# EAGLE board CheetahBooster (EAGLE 7.6.0)

Size 76.74 x 69.29 mm. Coordinates in mm from the lower left corner, seen from the top.
Outline: 0,0 76.74,0 76.74,69.29 0,69.29 0,0
Copper layers (1*16): Top 0.035mm / dielectric 1.5mm / Bottom 0.035mm
Design rules "default": minimum track width 10mil, minimum drill 24mil, track to track 8mil, track to pad 8mil, pad to pad 8mil, via to via 8mil, smd to smd 8mil, copper to edge 40mil, drill to drill 8mil, minimum pad ring 10mil, minimum via ring 8mil, stop-mask expansion 4mil, vias tented up to drill 0mil, thermal gap 10mil

## Footprints (pad centres in the part's own frame; a part is rotated, then mirrored left to right if it is on the bottom)
DIL16 = drill 0.813 long: 1 -8.89,-3.81; 2 -6.35,-3.81; 3 -3.81,-3.81; 4 -1.27,-3.81; 5 1.27,-3.81; 6 3.81,-3.81; 7 6.35,-3.81; 8 8.89,-3.81; 9 8.89,3.81; 10 6.35,3.81; 11 3.81,3.81; 12 1.27,3.81; 13 -1.27,3.81; 14 -3.81,3.81; 15 -6.35,3.81; 16 -8.89,3.81
DO35Z10 = drill 0.813 long: A 5.08,0; C -5.08,0
1X04 = drill 1.016 long: 1 -3.81,0; 2 -1.27,0; 3 1.27,0; 4 3.81,0
1X08 = drill 1.016 long: 1 -8.89,0; 2 -6.35,0; 3 -3.81,0; 4 -1.27,0; 5 1.27,0; 6 3.81,0; 7 6.35,0; 8 8.89,0
1206 = smd 1.6 x 1.803: A -1.422,0; C 1.422,0
R1206 = smd 1.6 x 1.803: 1 -1.422,0; 2 1.422,0
SIP10 = drill 0.6 long: 1 -11.46,0; 2 -8.92,0; 3 -6.38,0; 4 -3.84,0; 5 -1.3,0; 6 1.24,0; 7 3.78,0; 8 6.32,0; 9 8.86,0; 10 11.4,0
SOLDERJUMPER_ARROW_NOPASTE = smd 0.762 x 1.524: 1 -1.016,0; 2 1.016,0

## Placement (x,y rotation side)
4017BE  CD4017  [DIL16]  7.85,46.07 90 top
D1  1N821  [DO35Z10]  23,31.52 180 top
D2  1N821  [DO35Z10]  23,27.01 180 top
D3  1N821  [DO35Z10]  23,39.38 180 top
D4  1N821  [DO35Z10]  23,51.42 180 top
D5  1N821  [DO35Z10]  23,55.92 180 top
D6  1N821  [DO35Z10]  23,35.53 180 top
D7  1N821  [DO35Z10]  23,43.33 180 top
D8  1N821  [DO35Z10]  23,47.41 180 top
D9  1N821  [DO35Z10]  23,60.3 180 top
JP_CLOCK_IN  [1X04]  38,28.51 0 top
JP_LED  [1X08]  58.5,46.01 90 top
JP_RES_GND  [1X08]  66.2,46.01 90 top
LED_START  [1206]  6.5,29.01 0 top
R2_100_O  [R1206]  6.5,26.01 180 top
RN1  [SIP10]  69.73,18.87 90 top
SJ1  [SOLDERJUMPER_ARROW_NOPASTE]  57,11.51 0 top
SJ2  [SOLDERJUMPER_ARROW_NOPASTE]  57,8.51 0 top
SJ3  [SOLDERJUMPER_ARROW_NOPASTE]  57,5.51 0 top
SJ4  [SOLDERJUMPER_ARROW_NOPASTE]  57,18.51 0 top
SJ5  [SOLDERJUMPER_ARROW_NOPASTE]  57,15.51 0 top
SJ6  [SOLDERJUMPER_ARROW_NOPASTE]  57,22.51 0 top
SJ7  [SOLDERJUMPER_ARROW_NOPASTE]  57,25.51 0 top
SJ8  [SOLDERJUMPER_ARROW_NOPASTE]  51.5,38.51 0 top
SJ9  [SOLDERJUMPER_ARROW_NOPASTE]  51.5,41.51 0 top
SJ10  [SOLDERJUMPER_ARROW_NOPASTE]  51.5,45.51 0 top
SJ11  [SOLDERJUMPER_ARROW_NOPASTE]  51.5,48.51 0 top
SJ12  [SOLDERJUMPER_ARROW_NOPASTE]  45.5,48.51 0 top
SJ13  [SOLDERJUMPER_ARROW_NOPASTE]  45.5,45.51 0 top
SJ14  [SOLDERJUMPER_ARROW_NOPASTE]  45.5,58.51 0 top
SJ15  [SOLDERJUMPER_ARROW_NOPASTE]  45.5,55.51 0 top
SJ16  [SOLDERJUMPER_ARROW_NOPASTE]  45.5,52.51 0 top
SJ17  [SOLDERJUMPER_ARROW_NOPASTE]  63.5,25.51 0 top
SJ18  [SOLDERJUMPER_ARROW_NOPASTE]  63.5,22.51 0 top
SJ19  [SOLDERJUMPER_ARROW_NOPASTE]  63.5,19.51 0 top
SJ20  [SOLDERJUMPER_ARROW_NOPASTE]  63.5,16.51 0 top

## Library data of the parts
4017BE = SparkFun-DigitalIC; PROD_ID: IC-11929
D1-D9 = diode
JP_CLOCK_IN JP_LED JP_RES_GND = pinhead
LED_START R2_100_O = adafruit
RN1 = resistor-sip
SJ1-SJ20 = microbuilder; BOM: EXCLUDE

## Nets
DO_NOT_USE: RN1.10
GND: 4017BE.8 4017BE.13 JP_CLOCK_IN.1 R2_100_O.1 RN1.1
LED_0: JP_LED.1 SJ1.2 SJ2.2 SJ3.2
LED_1: JP_LED.2 SJ4.2 SJ5.2
LED_2: JP_LED.3 SJ6.2 SJ7.2
LED_3: JP_LED.4 SJ8.2 SJ9.2
LED_4: JP_LED.5 SJ10.2 SJ11.2
LED_5: JP_LED.6 SJ12.2 SJ13.2
LED_6: JP_LED.7 SJ14.2 SJ15.2 SJ16.2
LED_7: JP_LED.8 SJ17.2 SJ18.2 SJ19.2 SJ20.2
N$1: LED_START.C R2_100_O.2
R0: JP_RES_GND.1 RN1.2
R1: JP_RES_GND.2 RN1.3
R2: JP_RES_GND.3 RN1.4
R3: JP_RES_GND.4 RN1.5
R4: JP_RES_GND.5 RN1.6
R5: JP_RES_GND.6 RN1.7
R6: JP_RES_GND.7 RN1.8
R7: JP_RES_GND.8 RN1.9
RESET: 4017BE.11 4017BE.15
SEG_0: 4017BE.3 D1.A
SEG_0_0: D1.C LED_START.A SJ1.1
SEG_1: 4017BE.2 D2.A
SEG_1_1: D2.C SJ2.1 SJ4.1
SEG_2: 4017BE.4 D3.A
SEG_2_2: D3.C SJ3.1 SJ6.1 SJ10.1
SEG_3: 4017BE.7 D4.A
SEG_3_3: D4.C SJ5.1 SJ8.1 SJ12.1
SEG_4: 4017BE.10 D5.A
SEG_4_4: D5.C SJ7.1 SJ11.1 SJ14.1
SEG_5: 4017BE.1 D6.A
SEG_5_5: D6.C SJ9.1 SJ13.1 SJ17.1
SEG_6: 4017BE.5 D7.A
SEG_6_6: D7.C SJ15.1 SJ18.1
SEG_7: 4017BE.6 D8.A
SEG_7_7: D8.C SJ16.1 SJ19.1
SEG_8: 4017BE.9 D9.A
SEG_8_8: D9.C SJ20.1
TMR555_OUTPUT: 4017BE.14 JP_CLOCK_IN.3
TMR555_OUTPUT_REVERSE: JP_CLOCK_IN.4
VCC: 4017BE.16 JP_CLOCK_IN.2

## Tracks (layer width: path | path; a pad name or v marks a point on that pad's centre or on a via)
GND  (4 unrouted)
LED_0  (3 unrouted)
LED_1  (2 unrouted)
LED_2  (2 unrouted)
LED_3  (2 unrouted)
LED_4  (2 unrouted)
LED_5  (2 unrouted)
LED_6  (3 unrouted)
LED_7  (4 unrouted)
N$1  (1 unrouted)
R0  (1 unrouted)
R1  (1 unrouted)
R2  (1 unrouted)
R3  (1 unrouted)
R4  (1 unrouted)
R5  (1 unrouted)
R6  (1 unrouted)
R7  (1 unrouted)
RESET  (1 unrouted)
SEG_0  (1 unrouted)
SEG_0_0  (2 unrouted)
SEG_1  (1 unrouted)
SEG_1_1  (2 unrouted)
SEG_2  (1 unrouted)
SEG_2_2  (3 unrouted)
SEG_3  (1 unrouted)
SEG_3_3  (3 unrouted)
SEG_4  (1 unrouted)
SEG_4_4  (3 unrouted)
SEG_5  (1 unrouted)
SEG_5_5  (3 unrouted)
SEG_6  (1 unrouted)
SEG_6_6  (2 unrouted)
SEG_7  (1 unrouted)
SEG_7_7  (2 unrouted)
SEG_8  (1 unrouted)
SEG_8_8  (1 unrouted)
TMR555_OUTPUT  (1 unrouted)
VCC  (1 unrouted)

## Text on the board
tNames: Available in 2020 | Chris, Eric, Erion, Frederic, Jeff, Katherine, Min. | OUT_R | GND | VCC | OUT | GND | C:/DVT/MadeInTheUSB.PCB/EXTENSIONS/Analog/CheetahBooster/Rambo Gray.bmp | C:/DVT/MadeInTheUSB.PCB/EXTENSIONS/Analog/CheetahBooster/Title.bmp
bNames: PCBv1 - 2020.02